# EAGLE board tf2 old (EAGLE 9.6.2)

Size 93.65 x 83.05 mm. Coordinates in mm from the lower left corner, seen from the top.
Outline: 0,0 93.65,0 93.65,83.05 0,83.05 0,0
Copper layers (1*16): Top 0.035mm / dielectric 1.5mm / Bottom 0.035mm
Design rules "SparkFun (modified) *": minimum track width 10mil, minimum drill 20mil, track to track 8mil, track to pad 8mil, pad to pad 8mil, via to via 8mil, smd to smd 8mil, copper to edge 8mil, drill to drill 8mil, minimum pad ring 12mil, minimum via ring 10mil, stop-mask expansion 4mil, vias tented up to drill 20mil, thermal gap 10mil

## Footprints (pad centres in the part's own frame; a part is rotated, then mirrored left to right if it is on the bottom)
XDCR_AI-1223-TWT-12V-R = drill 0.85: N 0,-3.8; P 0,3.8
ADAFRUIT_INDUSTRIES_3966_0 = drill 1 pad 1.78 square: 1 -8.89,-6.35 | drill 1 pad 1.78: 2 -6.35,-6.35; 3 -3.81,-6.35; 4 -1.27,-6.35; 5 1.27,-6.35; 6 3.81,-6.35; 7 6.35,-6.35; 8 8.89,-6.35
JST-PH-2-SMT-RA = smd 1 x 4.6: 1 1,-3.7; 2 -1,-3.7 | smd 1.6 x 3.4: NC1 -3.4,1.5; NC2 3.4,1.5
RESC3216X75N = smd 1.17 x 1.77: 1 -1.494,0; 2 1.494,0
XCVR_RFM95W-915S2 = smd 3 x 1.4: 1 -7.7,7; 2 -7.7,5; 3 -7.7,3; 4 -7.7,1; 5 -7.7,-1; 6 -7.7,-3; 7 -7.7,-5; 8 -7.7,-7; 9 7.7,-7; 10 7.7,-5; 11 7.7,-3; 12 7.7,-1; 13 7.7,1; 14 7.7,3; 15 7.7,5; 16 7.7,7
FGPMMOPA6H = smd 2 x 1: P$1 -7.5,6.75; P$2 -7.5,5.25; P$3 -7.5,3.75; P$4 -7.5,2.25; P$5 -7.5,0.75; P$6 -7.5,-0.75; P$7 -7.5,-2.25; P$8 -7.5,-3.75; P$9 -7.5,-5.25; P$10 -7.5,-6.75; P$11 7.5,-6.75; P$12 7.5,-5.25; P$13 7.5,-3.75; P$14 7.5,-2.25; P$15 7.5,-0.75; P$16 7.5,0.75; P$17 7.5,2.25; P$18 7.5,3.75; P$19 7.5,5.25; P$20 7.5,6.75 | hole 3: 0.5,0.85
TINYPICO-NANO-CONNECTOR = smd 1.2 x 1: 3V3 0.1,10.725; 5V 0.1,5.645; D+ 0.1,8.185; D- 0.1,6.915; EN 0.1,9.455; GND$1 0.1,3.105; RESET 0.1,4.375; STAT 0.1,1.835 | smd 3 x 3 rotated 45: GND$2 17.643,7.082 | smd 0.66 x 0.671: GND$3 19.436,6.746 | smd 2.54 x 2.54 rotated 45: GND$4 17.971,6.413 | smd 1 x 1.2: IO0 12.395,0.1; IO2 6.034,12.44; IO4 7.304,12.44; IO5 8.585,0.1; IO9 13.665,0.1; IO12 8.574,12.44; IO13 9.844,12.44; IO14 11.114,12.44; IO15 12.384,12.44; IO18 7.315,0.1; IO19 6.045,0.1; IO21 11.125,0.1; IO22 9.855,0.1; IO23 4.775,0.1; IO25 16.194,12.44; IO26 14.924,12.44; IO27 13.654,12.44; IO32 17.464,12.44; IO33 18.734,12.44; IO34 20.004,12.44; IO35 21.274,12.44; IO36 21.285,0.1; IO37 20.015,0.1; IO38 18.745,0.1; IO39 17.475,0.1; RX 14.935,0.1; TX 16.205,0.1; VBAT 4.764,12.44
U.FL = smd 2.2 x 1.05: 1 0,1.375; 2 0,-1.375 | smd 0.8 x 1: 3 1.525,0
GCT_USB4105-GF-A = smd 0.6 x 1.15: A1_B12 -3.2,4.755; A4_B9 -2.4,4.755; B1_A12 3.2,4.755; B4_A9 2.4,4.755 | smd 0.3 x 1.15: A5 -1.25,4.755; A6 -0.25,4.755; A7 0.25,4.755; A8 1.25,4.755; B5 1.75,4.755; B6 0.75,4.755; B7 -0.75,4.755; B8 -1.75,4.755 | drill 0.6 pad 1.05 long: S1 -4.32,4.18; S4 4.32,4.18 | drill 0.6 pad 1 long: S2 -4.32,0; S3 4.32,0 | hole 0.65: 2.89,3.68; -2.89,3.68

## Placement (x,y rotation side)
BEEPER  AI-1223-TWT-12V-R  [XDCR_AI-1223-TWT-12V-R]  46.99,63.09 90 bottom
BMP3XX  ADAFRUIT_INDUSTRIES_3966ADAFRUIT_INDUSTRIES_3966_0_0  [ADAFRUIT_INDUSTRIES_3966_0]  45.85,22.86 90 bottom
JST-PH  [JST-PH-2-SMT-RA]  62.23,25.4 0 bottom
R1  CR1206-JW-512ELF  [RESC3216X75N]  46.61,5.08 270 top
R2  CR1206-JW-512ELF  [RESC3216X75N]  62.23,5.08 90 top
U1  RFM95W-915S2  [XCVR_RFM95W-915S2]  65.83,40.64 90 bottom
U2  [FGPMMOPA6H]  67.31,60.96 270 top
U$1  TINYPICO-NANO-CONNECTOR  [TINYPICO-NANO-CONNECTOR]  61.21,47.99 180 top
UFL  [U.FL]  41.05,41.66 90 bottom
USB-C  USB4105-GF-A  [GCT_USB4105-GF-A]  54.44,3.81 0 top

## Library data of the parts
BEEPER = buzzer; AVAILABILITY: In Stock; DESCRIPTION: ELECTRO-MECHANICAL AUDIO INDICATOR; MF: PUI Audio,; MP: AI-1223-TWT-12V-R; PACKAGE: None; PRICE: None; PURCHASE-URL: https://pricing.snapeda.com/search/part/AI-1223-TWT-12V-R/?ref=eda
BMP3XX = BMP388 Breakout; AUTOMOTIVE: No; CENTROID_NOT_SPECIFIED: No; DATASHEET: https://cdn-learn.adafruit.com/downloads/pdf/adafruit-bmp388-bmp390-bmp3xx.pdf?timestamp=1628517945; DEVICE_CLASS_L1: Sensors; DEVICE_CLASS_L2: Pressure Sensors; DEVICE_CLASS_L3: unset; DIGIKEY_DESCRIPTION: BMP388 - PRECISION BAROMETRIC PR; DIGIKEY_PART_NUMBER: 1528-2733-ND; FOOTPRINT_VARIANT_NAME_0: Recommended_Land_Pattern; LEAD_FREE: Yes; MF: Adafruit Industries; MFG_PACKAGE_IDENT: 0; MFG_PACKAGE_IDENT_DATE: 0; MFG_PACKAGE_IDENT_REV: 0; MOUSER_PART_NUMBER: 485-3966; MPN: 3966; PACKAGE: MODULE_25MM40_17MM78; PIN_0_0_4_INSIDE_EDGE: clock; PREFIX: MD; ROHS: Yes; SENSOR_OUTPUT: I2C,SPI; VERIFICATION_VERSION: 0.0.0.3
JST-PH U2 UFL = adafruit
R1 R2 = resis CR1206-JW-512ELF; DESCRIPTION: 5.1 kOhms ±5% 0.25W, 1/4W Chip Resistor 1206 (3216 Metric) Moisture Resistant Thick Film; DIGI-KEY_PART_NUMBER: 118-CR1206-JW-512ELFTR-ND; MF: Bourns; MP: CR1206-JW-512ELF; PACKAGE: 3216 Bourns; PURCHASE-URL: https://pricing.snapeda.com/search/part/CR1206-JW-512ELF/?ref=eda
U1 = RFM95W-915S2; AVAILABILITY: In Stock; DESCRIPTION: 802.15.4 LoRa™ Transceiver Module 915MHz Antenna Not Included Surface Mount; MF: RF Solutions; MP: RFM95W-915S2; PACKAGE: Non Standard RF Solutions; PRICE: None; PURCHASE-URL: https://pricing.snapeda.com/search/part/RFM95W-915S2/?ref=eda
U$1 = TinyPICO_NANO_Eagle
USB-C = USB-C Adafruit USB4105-GF-A; DESCRIPTION: USB-C (USB TYPE-C) USB 2.0 Receptacle Connector 24 (16+8 Dummy) Position Surface Mount, Right Angle; Through Hole; DIGI-KEY_PART_NUMBER: 2073-USB4105-GF-ATR-ND; MF: GCT; MP: USB4105-GF-A; PACKAGE: None; PURCHASE-URL: https://pricing.snapeda.com/search/part/USB4105-GF-A/?ref=eda

## Nets
3VO: BMP3XX.2
ANT: U1.9 UFL.3
CS: U1.5 U$1.IO5
DN: U$1.D- USB-C.A7 USB-C.B7
DP: U$1.D+ USB-C.A6 USB-C.B6
FIX: U2.P$5 U$1.IO39
GND: BEEPER.N BMP3XX.3 JST-PH.2 U1.1 U1.8 U1.10 U2.P$3 U2.P$8 U2.P$12 U2.P$19 U$1.GND$1 U$1.GND$2 U$1.GND$3 U$1.GND$4 UFL.1 UFL.2 USB-C.A1_B12 USB-C.B1_A12
GPIO9: BEEPER.P U$1.IO9
MISO: U1.2 U$1.IO19
MOSI: U1.3 U$1.IO23
N$4: U$1.IO36
RST: U1.6 U$1.IO0
RX: U2.P$10 U$1.TX
SCK: U1.4 U$1.IO18
SCL: BMP3XX.4 U$1.IO22
SDA: BMP3XX.6 U$1.IO21
SHELL_GND: USB-C.S1 USB-C.S2 USB-C.S3 USB-C.S4
TX: U2.P$9 U$1.RX
VBACK: U2.P$4
VBAT: JST-PH.1 U$1.VBAT
VCC: BMP3XX.1 U1.13 U2.P$1 U$1.3V3
VIN: U$1.5V USB-C.A4_B9 USB-C.B4_A9

## Tracks (layer width: path | path; a pad name or v marks a point on that pad's centre or on a via)
ANT  (1 unrouted)
CS  (1 unrouted)
DN  (2 unrouted)
DP  (2 unrouted)
FIX  (1 unrouted)
GND  (17 unrouted)
GPIO9  (1 unrouted)
MISO  (1 unrouted)
MOSI  (1 unrouted)
RST  (1 unrouted)
RX  (1 unrouted)
SCK  (1 unrouted)
SCL  (1 unrouted)
SDA  (1 unrouted)
SHELL_GND  (3 unrouted)
TX  (1 unrouted)
VBAT  (1 unrouted)
VCC  (3 unrouted)
VIN  (2 unrouted)

## Text on the board
tNames: TinyPICO NANO
bNames: GND | ANT